# Altium PCB Mainv0.1.PcbDoc
Units mm, origin at the board's own origin, x right, y up, seen from the top; angles counter-clockwise.
Board outline 34.54 x 41.53 mm, 2 copper layers (Top Layer, Bottom Layer); 17 components, 23 nets, 88 pads, 9 vias.
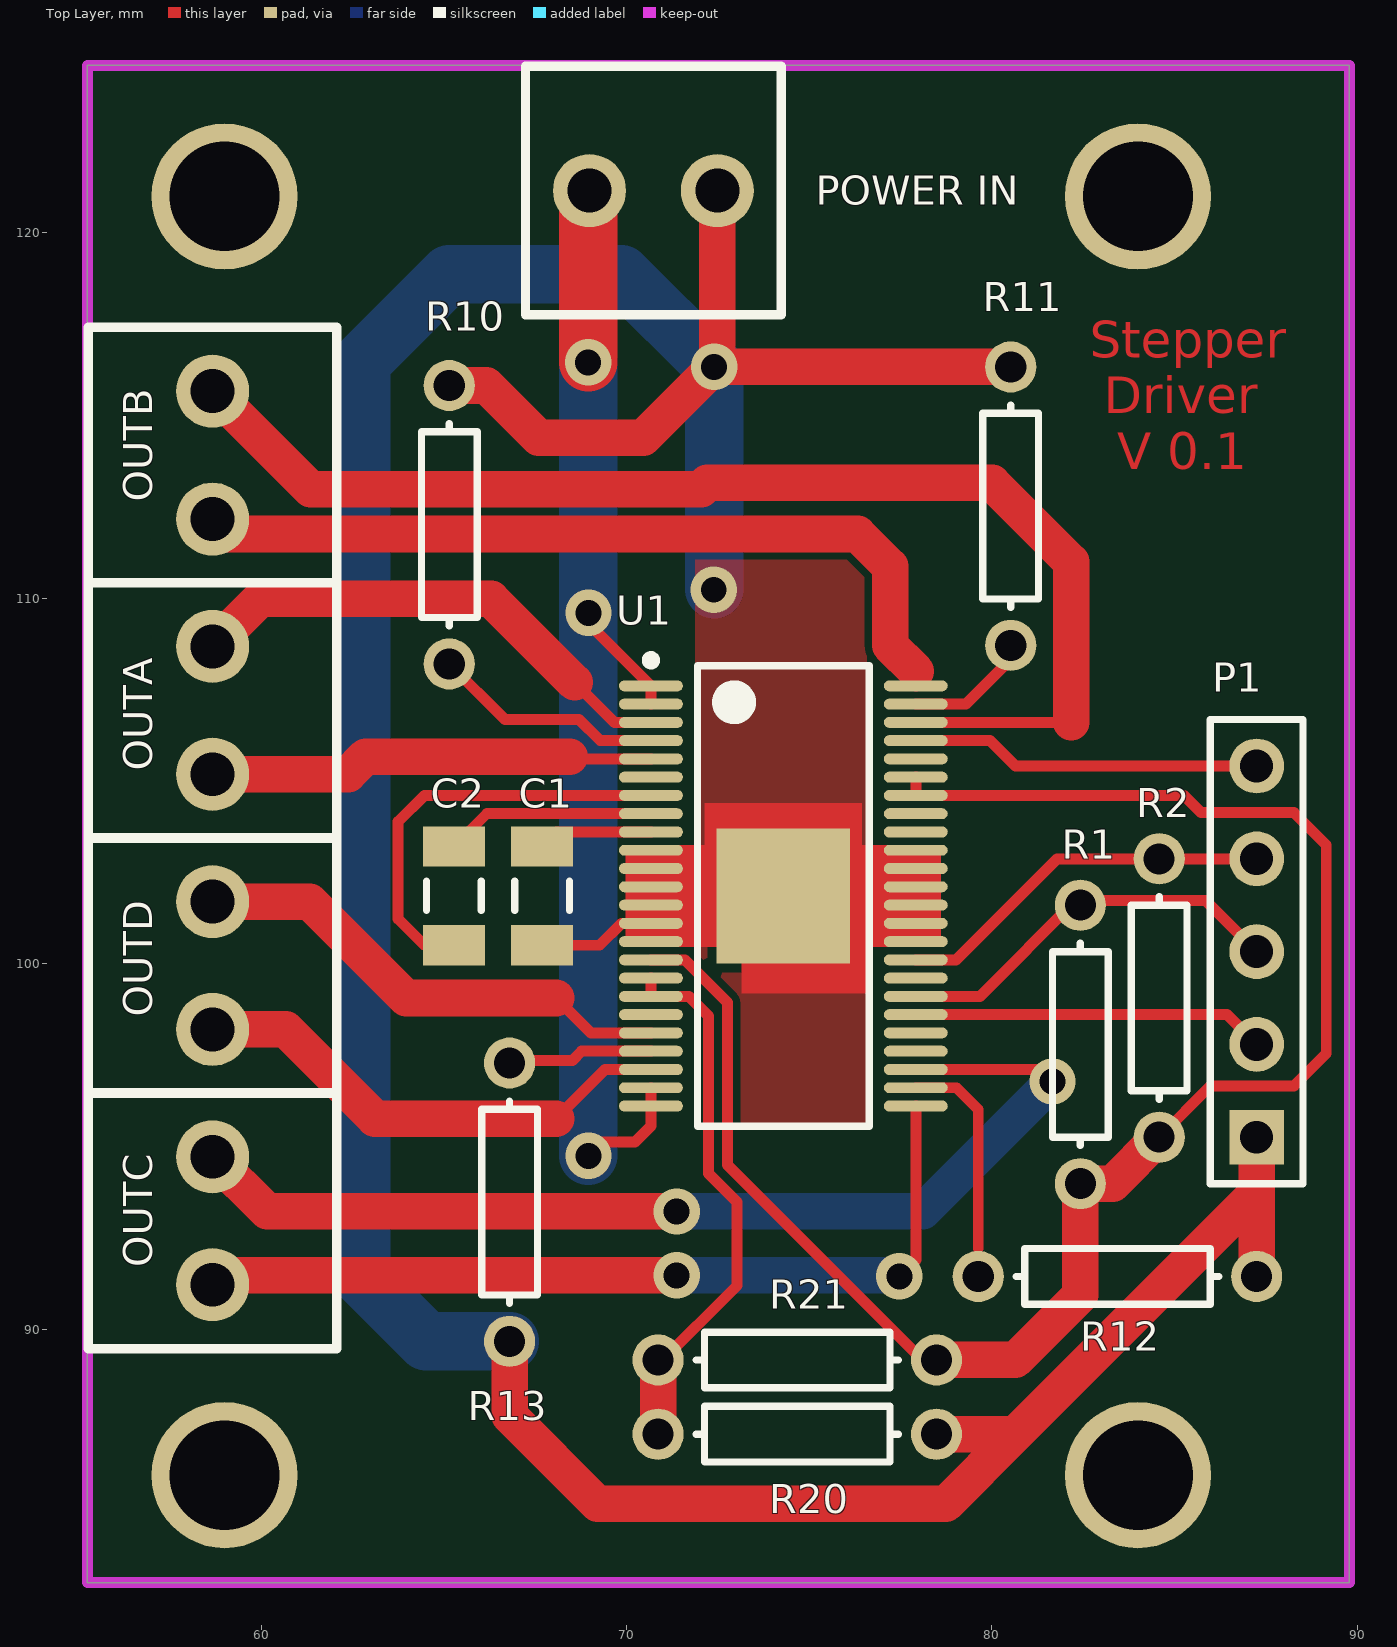
[diagram p0: Top Layer view]
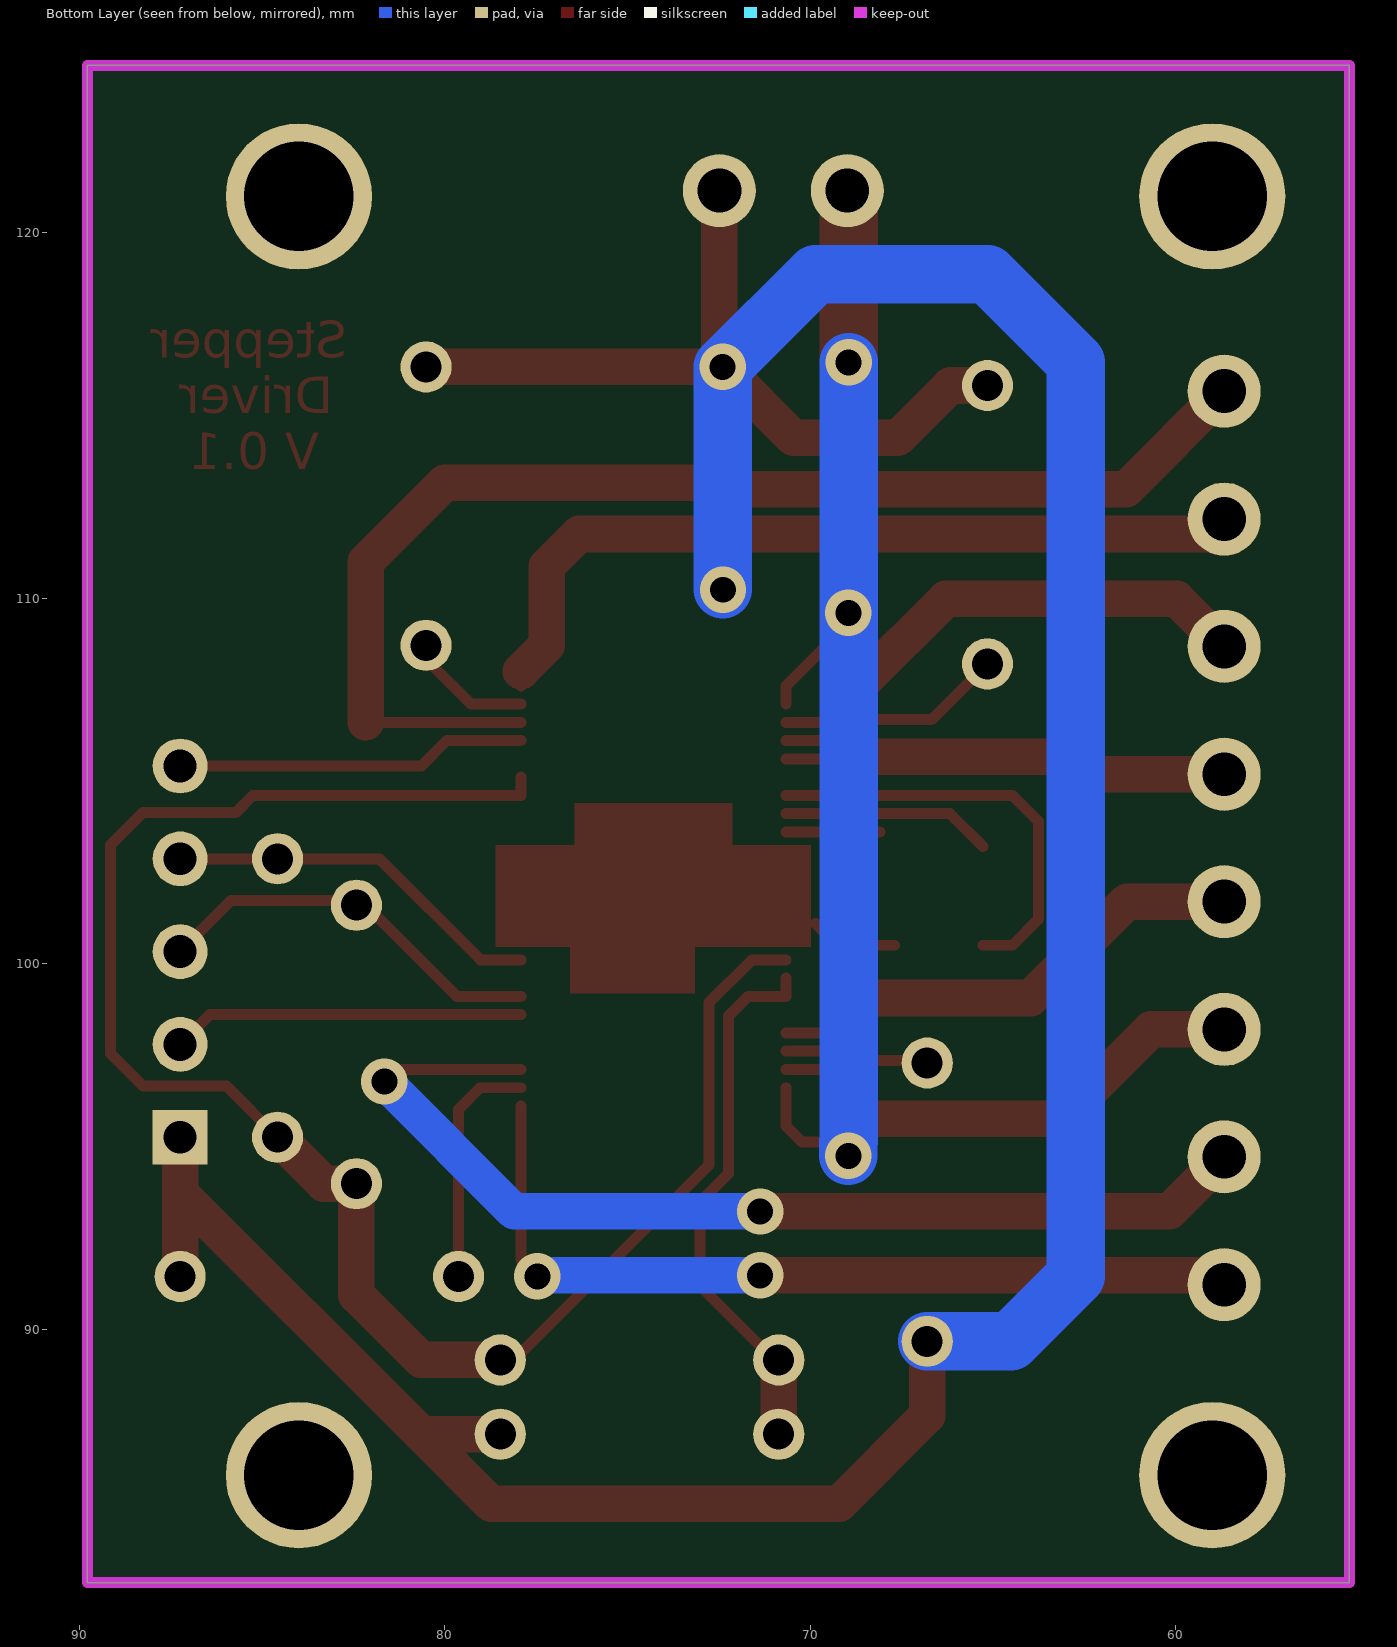
[diagram p1: Bottom Layer view, seen from below]

## Layer stack, top to bottom
Top Layer: signal copper 0.0356
Dielectric: dielectric 0.32, FR-4, Dk 4.8
Bottom Layer: signal copper 0.0356

## Board outline
55.245,83.058 55.245,124.587 89.789,124.587 89.789,83.058

## Design rules (kind name [scope] priority, off if disabled: settings)
Clearance Clearance_1 [InNet('PGND')] p1 off: gap=0.4
Clearance [All] p2: gap=0.2
PolygonConnect [All] p1: connectstyle=Relief reliefconductorwidth=0.254 reliefentries=4 polygonreliefangle="90 Angle" airgapwidth=0.254
RoutingVias [All] p1: holewidth=0.8 width=1.2 viastyle="Through Hole" minholewidth=0.711 minwidth=1.27 maxholewidth=0.711 maxwidth=1.27
SolderMaskExpansion [All] p1: expansion=0.102
Width [All] p1: maxlimit=2 minlimit=0.3 preferedwidth=0.3
28 further rules are at their usual default settings.

## Components (designator, comment, footprint, x,y, rotation, side; value= is the part's Value field where it differs from the comment)
C1 "Cap Semi" C1206 65.278,101.854 r270 top
C2 "Cap Semi" C1206 67.691,101.854 r90 top
OUTA "Power Connector" PCBComponent_1 58.674,106.934 r270 top
OUTB "Power Connector" PCBComponent_1 58.674,113.919 r270 top
OUTC "Power Connector" PCBComponent_1 58.674,92.964 r90 top
OUTD "Power Connector" PCBComponent_1 58.674,99.949 r270 top
P1 "Header 5" HDR1X5 87.249,95.25 r90 top
"POWER IN" "Power Connector" PCBComponent_1 70.739,121.158 r0 top
R1 "Res1" AXIAL-0.3 82.423,97.79 r90 top
R2 "Res1" AXIAL-0.3 84.582,99.06 r90 top
R10 "Res1" AXIAL-0.3 65.151,112.014 r90 top
R11 "Res1" AXIAL-0.3 80.518,112.522 r90 top
R12 "Res1" AXIAL-0.3 83.439,91.44 r0 top
R13 "Res1" AXIAL-0.3 66.802,93.472 r270 top
R20 "Res1" AXIAL-0.3 74.676,89.154 r0 top
R21 "Res1" AXIAL-0.3 74.676,87.122 r180 top
U1 "DRV8823" TSSOP50P810X120_HS-49N 74.295,101.854 r0 top

## Footprints (in the part's own frame and the unit in brackets; to place one, negate y for a bottom-side part, rotate by r counter-clockwise, add the part's x,y. Pads: shape width x height; smd on the part's side, far side on the other; paste and mask are expansions set on the pad)
AXIAL-0.3 [mm] "Axial Device, Thru-Hole; 2 Leads; 0.3 in Pin Spacing"
  round 1.4 hole 0.85: 1(-3.81,0) 2(3.81,0)
  silkscreen extent -2.77,-0.76 2.77,0.76
C1206 [mm] "Chip Capacitor, Body 3.2x1.6mm, IPC High Density"
  rect 1.1x1.7 smd: 1(-1.35,0) 2(1.35,0)
  silkscreen extent -0.4,-0.75 0.4,0.75, body extent -1.7,-0.9 1.7,0.9, height 1.3
HDR1X5 [mm] "Connector; Header; 5 Position"
  rect 1.5x1.5 hole 0.9: 1(0,0)
  round 1.5 hole 0.9: 2(2.54,0) 3(5.08,0) 4(7.62,0) 5(10.16,0)
  silkscreen extent -1.27,-1.27 11.43,1.27
PCBComponent_1 [mm]
  rrect100% 2x2 hole 1.2: 1(-1.75,0) 2(1.75,0)
  silkscreen extent -3.5,-3.4 3.5,3.4
TSSOP50P810X120_HS-49N [mm] "TSSOP, 48-Leads, Body 12,50x6,10mm, Pitch 0,50mm, Thermal Pad 3,70.2x3,65.2mm, IPC Medium Density"
  rect 3.65x3.7 smd: 0(0,0)
  oval 1.75x0.3 smd: 1(-3.625,5.75) 2(-3.625,5.25) 3(-3.625,4.75) 4(-3.625,4.25) 5(-3.625,3.75) 6(-3.625,3.25) 7(-3.625,2.75) 8(-3.625,2.25) 9(-3.625,1.75) 10(-3.625,1.25) 11(-3.625,0.75) 12(-3.625,0.25) 13(-3.625,-0.25) 14(-3.625,-0.75) 15(-3.625,-1.25) 16(-3.625,-1.75) 17(-3.625,-2.25) 18(-3.625,-2.75) 19(-3.625,-3.25) 20(-3.625,-3.75) 21(-3.625,-4.25) 22(-3.625,-4.75) 23(-3.625,-5.25) 24(-3.625,-5.75) 25(3.625,-5.75) 26(3.625,-5.25) 27(3.625,-4.75) 28(3.625,-4.25) 29(3.625,-3.75) 30(3.625,-3.25) 31(3.625,-2.75) 32(3.625,-2.25) 33(3.625,-1.75) 34(3.625,-1.25) 35(3.625,-0.75) 36(3.625,-0.25) 37(3.625,0.25) 38(3.625,0.75) 39(3.625,1.25) 40(3.625,1.75) 41(3.625,2.25) 42(3.625,2.75) 43(3.625,3.25) 44(3.625,3.75) 45(3.625,4.25) 46(3.625,4.75) 47(3.625,5.25) 48(3.625,5.75)
  silkscreen extent -3.75,-6.3 2.35,6.57, body extent -3.1,-6.3 3.1,6.3, height 1.2

## Part data
C1 C2: "Capacitor (Semiconductor SIM Model)"
P1: "Header, 5-Pin"
R1 R2 R10 R11 R12 R13 R20 R21: "Resistor"
U1: "4-BRIDGE  SERIAL  INTERFACE  MOTOR  DRIVER"

## Free pads (board coordinates)
  rrect100% 4x4 hole 3: 3(59,121) 4(84,121) 5(59,86) 6(84,86)

## Via types
v1: diameter 1.27, hole 0.711, Top Layer to Bottom Layer, 8 vias
v2: diameter 1.27, hole 0.7, Top Layer to Bottom Layer, 1 vias

## Nets (pads, with @x,y where several pads share a name; then routed paths per layer and width w, separated by ;. In a path a pad name is that pad's centre, name@x,y a point inside that pad or via, vN(x,y) a via of type N, cw(c..) or ccw(c..) an arc to the next point about the centre after c; other vN are vias at no path point)
AOUT1: OUTA.1 U1.3 | length 13.9
  Top Layer w0.3: 68.58,107.696 69.672,106.604 U1.3
  Top Layer w1: OUTA.1 59.972,109.982 66.294,109.982 68.58,107.696
AOUT2: OUTA.2 U1.5 | length 12.2
  Top Layer w0.3: 68.453,105.604 U1.5
  Top Layer w1: OUTA.2 62.385,105.184 62.865,105.664 68.453,105.664
BOUT1: OUTB.1 U1.46 | length 34.2
  Top Layer w0.3: U1.46 82.169,106.604
  Top Layer w1: OUTB.1 61.354,112.989 72.043,112.989 72.211,113.157 80.01,113.157 82.169,110.998 82.169,106.604
BOUT2: OUTB.2 U1.48 | length 22.6
  Top Layer w0.3: U1.48 77.92,108.008
  Top Layer w1: OUTB.2 59.083,111.76 76.327,111.76 77.216,110.871 77.216,108.712 77.92,108.008
COUT1: OUTC.1 U1.25 | length 23.6
  Top Layer w0.3: v1(77.47,91.44) 77.92,91.89 U1.25
  Top Layer w1: OUTC.1@58.674,91.468 v1(71.374,91.468)
  Bottom Layer w1: v1(71.374,91.468) v1@77.47,91.468
COUT2: OUTC.2 U1.27 | length 28.5
  Top Layer w0.3: U1.27 v1@81.331,97.104
  Top Layer w1: OUTC.2 60.17,93.218 v1(71.374,93.218)
  Bottom Layer w1: v1(71.374,93.218) 78.105,93.218 v1(81.661,96.774)
DOUT1: OUTD.1 U1.20 | length 13.5
  Top Layer w0.3: 68.072,99.06 69.028,98.104 U1.20
  Top Layer w1: OUTD.1 61.33,101.699 63.969,99.06 68.072,99.06
DOUT2: OUTD.2 U1.22 | length 13.6
  Top Layer w0.3: 68.072,95.758 69.418,97.104 U1.22
  Top Layer w1: OUTD.2 60.678,98.199 63.119,95.758 68.072,95.758
NetC1_1: C1.1 U1.8 | length 5.8
  Top Layer w0.3: C1.1 66.178,104.104 U1.8
NetC1_2: C1.2 U1.7 | length 11.7
  Top Layer w0.3: C1.2 64.469,100.504 63.754,101.219 63.754,103.886 64.472,104.604 U1.7
NetC2_2: C2.2 U1.9 | length 2.6
  Top Layer w0.3: C2.2@68.091,103.604 U1.9
NetR10_1: R10.1 U1.4 | length 6.4
  Top Layer w0.3: R10.1 66.675,106.68 68.707,106.68 69.283,106.104 U1.4
NetR11_1: R11.1 U1.47 | length 3.3
  Top Layer w0.3: U1.47 79.291,107.104 80.391,108.204 R11.1@80.391,108.585
NetR12_1: R12.1 U1.26 | length 5.8
  Top Layer w0.3: U1.26 79.037,96.604 79.629,96.012 79.629,92.202
NetR13_1: R13.1 U1.21 | length 3.5
  Top Layer w0.3: R13.1@67.31,97.354 68.525,97.354 68.775,97.604 U1.21
PGND: "POWER IN.2" C2.1 P1.1 R10.2 R11.2 R12.2 R13.2 R21.1 U1.0 U1.10 U1.11 U1.12 U1.13 U1.14 U1.15 U1.34 U1.35 U1.36 U1.37 U1.38 U1.39 | length 110.4
  Top Layer w0.3: C2.1 69.262,100.504 U1.14@69.862,101.104 ; U1.15 U1.14 U1.13 U1.12 U1.11 U1.10 71.735,103.104 ; U1.34 U1.35 U1.36 U1.37 U1.38 U1.39
  Top Layer w1: R10.2 66.167,115.824 67.602,114.389 70.456,114.389 v1@72.272,116.205 ; R13.2 66.802,87.63 69.215,85.217 78.74,85.217 80.645,87.122 ; v1(72.399,116.332) R11.2 ; v1@72.489,116.422 72.489,121.158 ; R21.1 80.645,87.122 ; R12.2 87.249,93.726 ; P1.1 87.249,93.726 ; 80.645,87.122 87.249,93.726
  Bottom Layer w1.6: R13.2 64.516,89.662 62.738,91.44 62.738,116.459 65.151,118.872 69.859,118.872 v1(72.399,116.332) v2@72.399,110.245
  other v2: 72.39,110.236
SCLK: P1.4 R2.2 U1.33 | length 10.5
  Top Layer w0.3: U1.33 79.022,100.104 81.788,102.87 P1.4
SCS: P1.5 U1.45 | length 9.7
  Top Layer w0.3: U1.45 79.951,106.104 80.645,105.41 P1.5@87.376,105.41
SDATA: P1.3 R1.2 U1.31 | length 11
  Top Layer w0.3: U1.31 79.673,99.104 82.296,101.727 85.852,101.727 P1.3
SSTB: P1.2 U1.30 | length 9.7
  Top Layer w0.3: U1.30 86.435,98.604 P1.2
V3P3: R1.1 R2.1 R20.2 U1.16 U1.42 U1.43 | length 48.2
  Top Layer w0.3: U1.16 71.602,100.104 72.771,98.935 72.771,94.488 R20.2@77.915,89.344 ; U1.43 U1.42 85.261,104.604 85.725,104.14 88.265,104.14 89.154,103.251 89.154,97.536 88.265,96.647 85.979,96.647 R2.1
  Top Layer w1: R20.2 80.645,89.154 82.423,90.932 R1.1 83.312,93.98 R2.1
VM: "POWER IN.1" U1.1 U1.2 U1.23 U1.24 | length 32.9
  Top Layer w0.3: v1(68.961,94.742) 68.961,95.123 70.231,95.123 70.67,95.562 U1.24 U1.23 ; v1(68.961,109.601) 68.961,109.313 U1.1 U1.2
  Top Layer w1.6: v1(68.95,116.459) 68.95,121.119
  Bottom Layer w1.6: v1(68.95,116.459) 68.95,95.134 68.961,95.123 v1(68.961,94.742)
VREF: R20.1 R21.2 U1.17 U1.18 | length 15
  Top Layer w0.3: U1.17 U1.18 71.711,99.104 72.244,98.571 72.244,94.253 73.025,93.472 73.025,91.186 R20.1@70.866,89.027
  Top Layer w1: R21.2 R20.1@70.866,89.027
pads on no net: U1.6 U1.19 U1.28 U1.29 U1.32 U1.40 U1.41 U1.44

## Polygon pours and split planes (outlines as drawn)
PGND on Top Layer "PGND" (solid, remove dead copper, pour order 4): 76.581,95.631 71.882,95.631 71.882,111.252 76.517,111.252 76.581,111.128

## Keep-outs
Keep-Out Layer:
  the board outline again, w0.3

## Other copper
Top Layer:
  rectangle net PGND: 73.152,99.187 76.581,100.838
  rectangle net PGND: 72.136,103.124 76.454,104.394
  rectangle net PGND: 69.977,100.457 78.613,103.251
  text "Stepper" at 82.677,116.586 h1
  text "Driver" at 83.058,115.062 h1
  text "V 0.1" at 83.439,113.538 h1